# Altium PCB SV06.PcbDoc (part 2 of 3)
Units mil, origin at the board's own origin, x right, y up, seen from the top; angles counter-clockwise.
Board outline 3960.63 x 2763.78 mil, 2 copper layers (Top, Bottom), stack 12.7 mil thick; 211 components, 173 nets, 726 pads, 644 vias.
Unrouted connection lines stored in the file: 411.
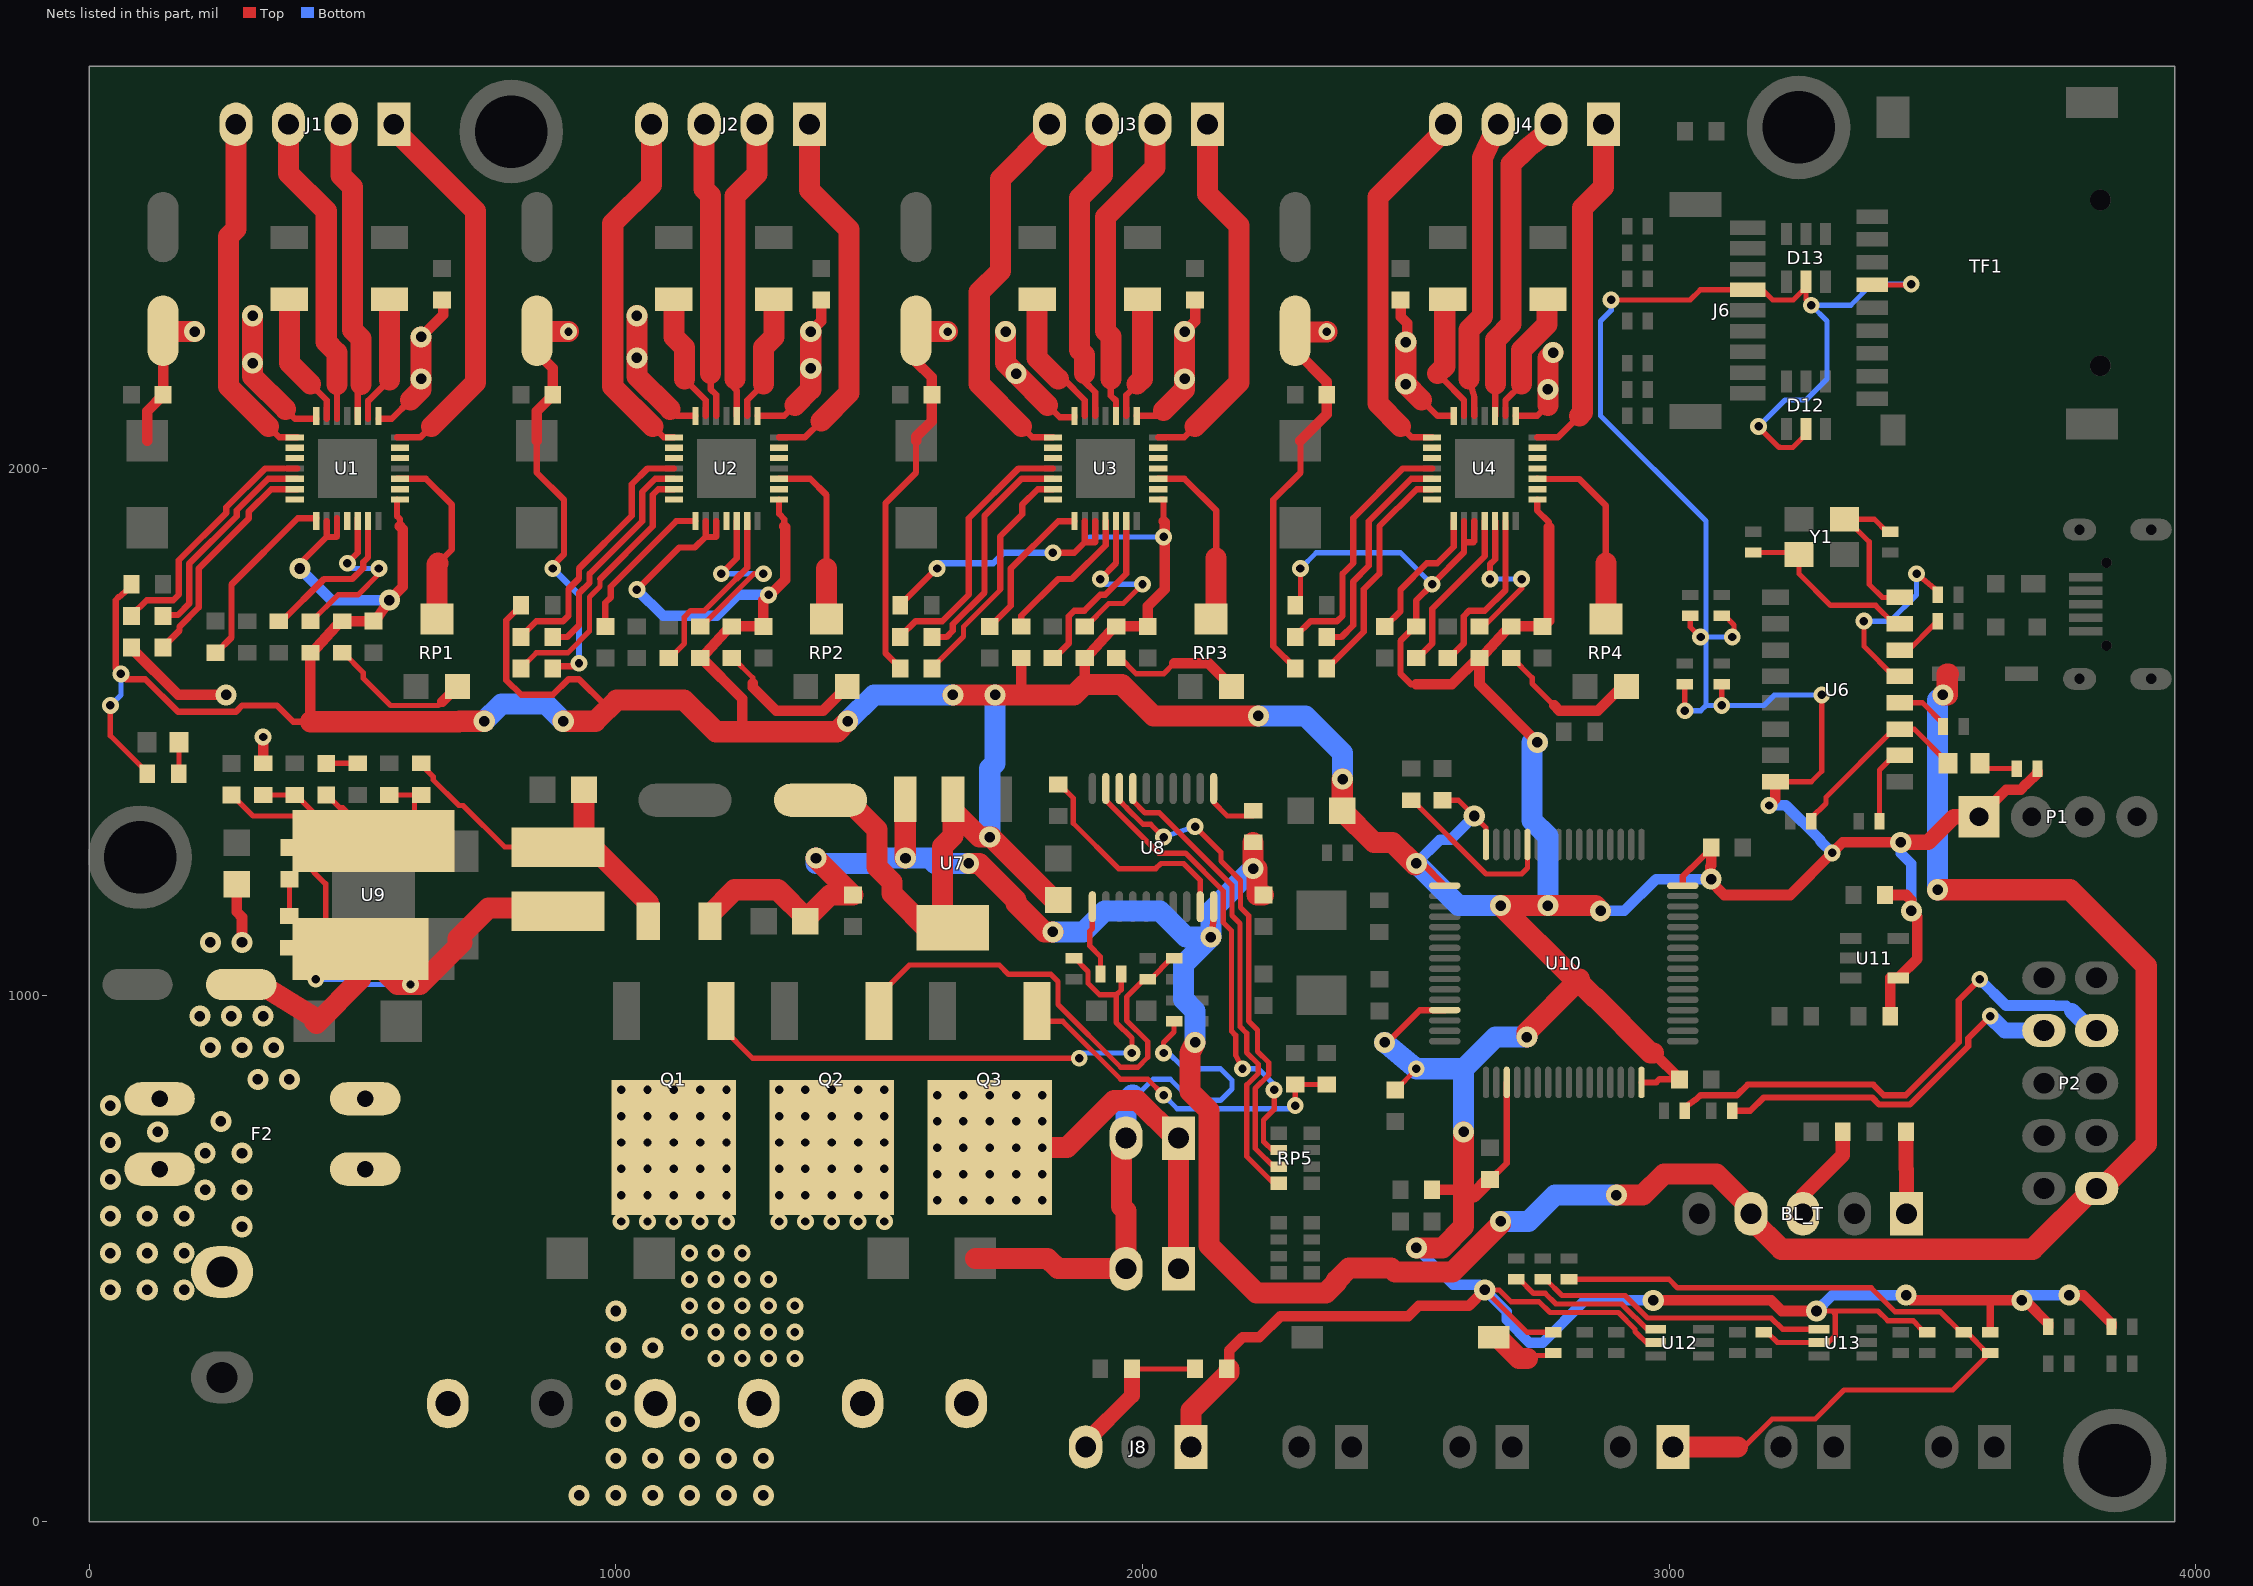
[diagram p2: the nets of this part, all layers, seen from the top]

## Via types
v1: diameter 32, hole 16, Top to Bottom, 363 vias
v2: diameter 40, hole 20, Top to Bottom, 281 vias

## Nets (pads, with @x,y where several pads share a name; then routed paths per layer and width w, separated by ;. In a path a pad name is that pad's centre, name@x,y a point inside that pad or via, vN(x,y) a via of type N, cw(c..) or ccw(c..) an arc to the next point about the centre after c; other vN are vias at no path point)
3V3: C22.1 C25.1 C28.1 C31.1 C36.2 C40.2 C41.2 C44.1 C51.2 C52.2 C53.2 C60.1 D12.5 D13.5 J6.4 J8.1 P1.1 R1.2 R2.2 R3.2 R4.2 R5.2 R6.2 R7.2 R8.2 R11.2 R12.2 R15.2 R16.2 R19.2 R20.2 R21.2 R23.2 R24.2 R25.2 R26.2 R37.1 R44.1 R49.2 R50.2 R52.2 R54.2 R56.2 R57.2 R59.2 R63.2 R66.2 TF1.4 U1.9 U1.10 U1.15 U2.9 U2.10 U2.15 U3.9 U3.10 U3.15 U4.9 U4.10 U4.15 U6.16 U7.2 U7.4 U10.1 U10.13 U10.19 U10.32 U10.48 U10.64 U11.4 U12.5 U13.5 | length 20809.5
  Top w10: v1(40,1550) 40,1492.5 110,1422.5 R26.2@110,1420 ; R8.2@2290,1740 2300,1740 v1(2300,1810) ; C52.2@2480,820 2481,820 2520,859 v1(2520,860) ; C36.2@2570,1370 2600,1370 v2(2630,1340) 2652.36,1317.64 U10.64@2652.36,1285.91 ; R63.2@2780,359.68 2730.32,359.68 v2(2650,440) 2677.54,440 2700,417.54 2753.18,417.54 2773.71,397.01 2903.81,397.01 2935.38,365.45 2935.38,361.42 2960.05,336.75 2974.72,336.75 U12.5@2974.72,340 ; v1(2890,2320) 3040,2320 3059.37,2339.37 J6.4@3158.07,2339.37 ; v1(3030,1540) R2.2@3030,1590.32 ; R1.2@3040,1720.32 3040,1699.48 3059.74,1679.74 v1(3060,1680) ; v1(3100,1550) R3.2@3100,1590.32 ; R4.2@3100,1720.32 3105.91,1720.32 3123.53,1702.7 3123.53,1683.53 v1(3120,1680) ; J6.4@3149.51,2339.37 J6.4@3158.07,2339.37 ; v1(3170,2080) 3170,2078.78 3208.78,2040 3209.77,2040 3210,2040.23 3210.23,2040 3234.97,2040 3260,2065.03 D12.5@3260,2074.76 ; R50.2@3180,359.68 3185.91,359.68 3205.59,340 U13.5@3284.72,340 3284.72,336.75 3299.39,336.75 3315.43,352.79 3315.43,394.57 3310,400 ; U6.16@3201.89,1405 3270,1405 3290,1425 v1(3290,1570) ; D13.5@3260,2354.76 D13.5@3260,2344.13 ; v1(3270,2310) 3260,2320 D13.5@3260,2344.13 ; v2(3280,400) 3310,400 ; TF1.4@3385.83,2348.43 3458.43,2348.43 v1(3460,2350) ; R52.2@3490,359.68 3483.63,359.68 3464.78,380.53 3463.63,381.68 3415.2,381.68 3396.87,400 3310,400 ; 3640,1390 3644.49,1394.49 3670.08,1394.49 3699.68,1424.09 R25.2@3699.68,1430 ; J6.4@3158.07,2339.37 3177.64,2339.37 3197.01,2320 3235.87,2320 D13.5@3260,2344.13
  Top w12: R5.2@80,1780 80,1776.07 55.26,1755.26 50,1750 50,1620 v1(60,1610) 70,1600 106.49,1600 168.49,1538 278.53,1538 290.53,1550 356.19,1550 387.19,1519 420,1519 ; v2(400,1810) 406.14,1825.51 450.63,1870 ; 450.63,1900.1 450.63,1870 ; 470.32,1905.51 470.32,1870.87 469.44,1870 450.63,1870 ; 584.49,1940.94 584.49,1909.28 590,1903.76 590,1890 ; R6.2@820,1740 792,1712 792,1598.03 820.03,1570 880,1570 910,1600 930,1600 980,1550 950,1520 ; v1(1040,1770) 1120,1850 1150,1850 1170.63,1870.63 ; 1170.63,1900.1 1170.63,1870.63 ; 1190.32,1900.1 1190.32,1870.87 1189.44,1870 1171.26,1870 1170.63,1870.63 ; 1309.9,1940.94 1309.9,1913.86 1320,1903.76 1320,1890 ; R7.2@1540,1740 1540,1741.46 1609.27,1810.73 v1(1610,1810) ; v1(1830,1840) 1870.63,1840 1890.63,1860 ; 1890.63,1900.1 1890.63,1860 ; 1910.32,1900.1 1910.32,1860.31 1910,1860 1890.63,1860 ; 2034.49,1940.94 2040,1940.94 2040,1900 ; v2(2460,910) 2462.63,907.37 2526.67,971.42 U10.13@2574.09,971.42 ; v2(2520,1250) 2531.73,1250 U10.1@2574.09,1207.64 ; 2520,1590 2510,1590 2490,1610 2490,1672.5 2517.5,1700 R21.2@2520,1700 2520,1749.37 2550.32,1779.68 v1(2550,1780) 2610.63,1840.63 2610.63,1860 ; 2610.63,1900.1 2610.63,1860 ; 2630.32,1900.1 2630.32,1861.68 2628.63,1860 2610.63,1860 ; C53.2@2660,650 2661,650 2691.73,680.73 U10.19@2691.73,834.09 ; 2749.9,1940.94 2749.9,1920 2772,1897.9 2772,1888 ; U10.32@2947.64,834.09 2975.87,834.09 2981.77,840 C51.2@3020,840 ; U10.48@3025.91,1207.64 3025.91,1225.64 3040.34,1240.08 3041.08,1240.08 3080,1279 C41.2@3080,1280
  Top w15: R54.2@3610,359.68 3610,420
  Top w20: 420,1519 R11.2@420,1650 423,1650 477,1710 R12.2@480,1710 C22.1@540,1710 542.94,1710 v2(570,1750) 595.46,1775.46 595.46,1884.54 590,1890 ; R15.2@1160,1640 R15.2@1162.5,1640 ; 1240,1500 1240,1562.5 R15.2@1162.5,1640 ; v1(1290,1760) 1280,1750 1280,1746.53 ; 1320,1890 1322,1888 1322,1788.53 1280,1746.53 ; 1770,1570 R66.2@1770,1640 ; 1890,1590 R19.2@1890,1640 1893,1640 1947,1700 R20.2@1950,1700 C28.1@2010,1700 2010,1738.37 2042,1770.37 2042,1898 2040,1900 ; R59.2@2160,290 2164.12,290 2165,290 2165,325 2190,350 2222.14,350 2262.14,390 2504.63,390 2524.63,410 2620,410 v2(2650,440) ; 2520,1590 2587.5,1590 2637.5,1640 R23.2@2640,1640 2643,1640 2697,1700 R24.2@2700,1700 C31.1@2760,1700 2761,1700 2772,1711 2772,1888 ; R49.2@2550,630 2610,630 2610,620 ; R23.2@2640,1630.37 2640,1590 v2(2750,1480) ; v2(2970,420) 3193.9,420 3213.9,400 v2(3280,400) ; 2970,890 2971,890 3020,841 C51.2@3020,840 ; C41.2@3080,1279 3080,1246.13 3078,1244.13 v2@3078,1218 ; v1(3190,1360) 3201.89,1371.89 U6.16@3201.89,1405 ; R37.1@3410,1190 3450,1190 3460,1180 v2(3460,1160) 3471.75,1148.25 3471.75,1069.17 U11.4@3435.18,1032.6 3420,1032.6 R44.1@3420,960 ; v2(3440,1290) 3330,1290 v1(3310,1270) 3230,1190 3104.75,1190 v2@3078,1216.75 ; v2(3450,430) 3448.97,430 3458.97,420 3610,420 v2(3670,420) 3676.23,420 3720.32,375.91 R56.2@3720.32,370 ; P1.1@3588.58,1338.58 3640,1390 3667.73,1390 3677.73,1400 3678.53,1400 3699.68,1421.15 R25.2@3699.68,1424.09 ; v2(3760,430) 3786.23,430 3840.32,375.91 R57.2@3840.32,370 ; R15.2@1162.5,1640 1163,1640 1217,1700 R16.2@1220,1700 C25.1@1280,1700 1280,1746.53 ; v2@3078,1216.75 v2(3080,1220) v2@3078,1218 ; v2@3078,1216.75 v2@3078,1218
  Top w28: 2610,620 2610.14,619.86 2628.86,619.86 2659,650 C53.2@2660,650
  Top w30: v2(3440,1290) 3492.2,1290 3540.78,1338.58 P1.1@3588.58,1338.58
  Top w40: 420,1519 702,1519 703,1520 v2(750,1520) ; v2(900,1520) 950,1520 961.69,1520 1001.69,1560 1129.75,1560 1189.75,1500 1240,1500 1420,1500 v2(1440,1520) ; C60.1@1388.63,1370 1439.81,1370 1495.74,1314.07 1495.74,1243.37 1524.5,1214.62 1524.5,1192.47 1601.69,1115.28 1640,1115.28 U7.4@1640,1128 1620,1128 1620,1281.69 1640,1301.69 U7.2@1640,1350.35 ; U7.2@1640,1372 U7.2@1640,1350.35 ; v2(1640,1570) v2(1720,1570) 1770,1570 1870,1570 1890,1590 1960.62,1590 2020.62,1530 v2(2220,1530) ; v2@1713.57,1300 v2@1712.76,1300 ; C44.1@1840,1180.63 1835.99,1180.63 1835.99,1176.61 1780,1232.6 1780,1232.76 v2@1712.76,1300 ; J8.1@2092.13,141.73 2092.13,211.4 2164.12,283.38 R59.2@2164.12,290 ; v2(2380,1410) 2379.37,1409.37 C40.2@2379.37,1350 2439.37,1290 2474.95,1290 2517.47,1247.47 v2(2520,1250) ; v2(2520,520) 2569.77,520 2610,560.23 2610,620 ; 2610,630 v2(2610,740) ; v2(2730,920) 2730,930 2830,1030 ; v2(2870,1160) 2860,1170 v2(2770,1170) v2(2680,1170) 2820,1030 2830,1030 ; 2970,890 2964.95,890 2860,994.95 2858.76,994.95 2830,1023.71 2830,1030 ; U7.2@1640,1350.35 1690.35,1300 v2(1710,1300) v2@1712.76,1300
  Bottom w10: v1(40,1550) 60,1570 v1(60,1610) ; v1(1830,1840) 1870,1840 1900,1870 v1(2040,1870) ; v1(2300,1810) 2330,1840 2490,1840 v1(2550,1780) ; v1(2890,2320) 2890,2300 2870,2280 2870,2100 3070,1900 v1@3070,1680 ; v1(3030,1540) 3060,1540 3070,1550 ; v1(3120,1680) v1@3070,1680 ; v1(3170,2080) 3220,2130 3260,2130 3300,2170 3300,2280 v1(3270,2310) 3345,2310 3385,2350 v1(3460,2350) ; v1(3290,1570) 3200,1570 3180,1550 v1(3100,1550) 3070,1550 ; 3070,1550 v1@3070,1670 ; v1@3070,1670 v1(3060,1680) v1@3070,1680 ; v1@3070,1670 v1@3070,1680
  Bottom w12: v1(1610,1810) 1610,1820 1716.63,1820 1736.63,1840 v1(1830,1840)
  Bottom w20: v2(400,1810) 460,1750 v2(570,1750) ; v1(1040,1770) 1090,1720 1191.63,1720 1231.63,1760 v1(1290,1760) ; v2(2520,520) 2590,450 2640,450 v2(2650,440) 2691.73,398.27 2691.73,383.02 2734.75,340 2760,340 2840,420 v2(2970,420) ; v2(2520,1250) 2565,1295 2585,1295 v2(2630,1340) ; v2(2870,1160) 2915.23,1160 2975.23,1220 v2(3080,1220) ; v1(3190,1360) 3222,1360 3287.37,1294.63 3287.37,1292.63 v1(3310,1270) ; v2(3280,400) 3310,430 v2(3450,430) ; v2(3440,1290) 3440,1269.63 3460,1249.63 v2(3460,1160) ; v2(3670,420) 3680,430 v2(3760,430)
  Bottom w40: v2(750,1520) 782.53,1552.53 867.47,1552.53 v2(900,1520) ; v2(1440,1520) 1490,1570 v2(1640,1570) ; v2(1710,1300) 1710,1430 1720,1440 v2(1720,1570) ; v2(2220,1530) 2310,1530 2380,1460 v2(2380,1410) ; v2(2460,910) v1(2520,860) 2610,860 ; v2(2520,1250) 2600,1170 v2(2680,1170) ; v2(2610,740) 2610,860 ; v2(2730,920) 2670,920 2610,860 ; v2(2750,1480) 2740,1480 2740,1331.58 2770,1301.58 v2(2770,1170)
5V: BL_T.4 C38.1 C39.2 C47.1 F1.2 P2.10 R36.1 U7.3 U8.20 | length 5705.8
  Top w12: v2(2130,1110) 2135.16,1145.16 U8.20@2135.16,1167.8
  Top w40: F1.2@1178.66,1140 1178.66,1153.19 1225.47,1200 1307.4,1200 C38.1@1362.2,1145.2 ; C38.1@1359.37,1140 C38.1@1359.37,1141.18 ; v2(1380,1260) 1379.61,1259.61 C39.2@1449.22,1190 ; C39.2@1450,1190 C39.2@1449.22,1190 ; U7.3@1549.45,1372 1549.45,1368 1549.45,1260 v2(1550,1260) ; v2(1670,1250) 1690,1250 1760,1180 1760,1173.86 1813.86,1120 v2(1830,1120) ; v2(2100,910) 2090,890 2090,816.45 2126,780.45 2126,524.6 2216.64,433.96 2348.01,433.96 2368,453.96 2368,457.4 2392.6,482 2472,482 2480,474 2588.82,474 2680,565.18 v2(2680,570) ; R36.1@2210,1290 v2(2210,1240) 2217.63,1240 2217.63,1190 C47.1@2230,1190 ; v2(2900,620) 2950,620 2990,660 3090,660 3155.51,594.49 BL_T.4@3155.51,584.65 3155.51,574.8 3213.01,517.31 3690.64,517.31 3806.01,632.68 P2.10@3811.81,632.68 3821.65,632.68 3906.15,717.17 3906.15,1054.95 3761.1,1200 v2(3510,1200) ; v2(3520,1570) 3528.24,1570 3528.24,1610 3530.5,1610 ; C38.1@1359.37,1141.18 1358.18,1141.18 C38.1@1359.37,1142.37 ; C38.1@1359.37,1141.18 C38.1@1359.37,1142.37 ; C38.1@1359.37,1142.37 1359.37,1144.01 C38.1@1361.01,1144.01 ; C38.1@1359.37,1142.37 C38.1@1361.01,1144.01 ; C38.1@1361.01,1144.01 1363.39,1144.01 C38.1@1362.2,1145.2 ; C38.1@1361.01,1144.01 C38.1@1362.2,1145.2 ; C38.1@1362.2,1145.2 1407,1190 C39.2@1449.22,1190
  Bottom w40: v2(1380,1260) 1380,1250 1494,1250 1504,1260 v2(1550,1260) 1596,1260 1606,1250 v2(1670,1250) ; v2(1830,1120) 1888.3,1120 1928.3,1160 2033,1160 2083,1110 v2(2130,1110) ; v2(2100,910) 2100,970 2078,992 2078,1058 v2(2130,1110) ; v2(2210,1240) 2130,1160 v2(2130,1110) ; v2(2680,570) 2733.3,570 2783.3,620 v2(2900,620) ; v2(3510,1200) 3510,1560 v2(3520,1570)
5VOUT: C46.1 F1.1 L1.2 R31.2 | length 704.2
  Top w10: R31.2@630,1440 630,1437.72 630.22,1437.72 653,1414.94 653,1408.82 701.82,1360 710,1360 788.98,1281.02 L1.2@890,1281.02
  Top w40: L1.2@890,1281.02 L1.2@934.55,1281.02 ; C46.1@939.37,1390 L1.2@939.37,1285.84 ; F1.1@1061.34,1140 1061.86,1140 1061.86,1174.51 944.95,1291.42 L1.2@939.37,1285.84 ; L1.2@934.55,1281.02 939.37,1281.02 L1.2@939.37,1285.84 ; L1.2@934.55,1281.02 L1.2@939.37,1285.84
24V: C1.2 C2.2 C3.1 C4.1 C5.1 C6.1 C7.1 C8.1 C9.1 C10.1 C11.2 C12.2 C20.1 C23.1 C26.1 C29.1 C42.1 C48.1 R27.2 U1.22 U1.28 U2.22 U2.28 U3.22 U3.28 U4.22 U4.28 U9.2 | length 5495.8
  Top w12: 372.49,2112.49 390.49,2094.49 430.94,2094.49 ; 549.06,2094.49 574.49,2094.49 610,2130 ; 850,2052.68 850,1992.17 901.37,1940.8 901.37,1836.83 877.27,1812.73 v1(880,1810) ; C23.1@880,1620 880,1624.55 930,1624.55 v1(930,1630) ; 1102.49,2112.49 1115.08,2099.9 1150.94,2099.9 ; 1269.06,2099.9 1319.9,2099.9 1340,2120 ; C26.1@1540,1620 1540,1621 1512,1649 1512,1934.17 1570,1992.17 1570,2052.68 ; 1820,2120 1842.63,2097.37 1870.94,2097.37 1870.94,2099.9 ; 1989.06,2099.9 2029.9,2099.9 2040,2110 ; C29.1@2290,1620 2290,1621 2248.63,1662.37 2248.63,1940.8 2300,1992.17 2300,2052.68 ; 2530,2130 2560.1,2099.9 2590.94,2099.9 ; 2709.06,2099.9 2749.9,2099.9 2770,2120
  Top w20: C20.1@80,1660 80,1659 169,1570 v2(260,1570) ; 110,2052.68 110,2109 140,2139 C9.1@140,2140 140,2260 C5.1@140,2261.57 ; C42.1@280,1210.63 280,1157.81 290,1147.81 v2(290,1100) ; R27.2@330,1440 v1(330,1490) ; v2(630,2250) 672,2292 672,2320 C1.2@670,2320 ; 850,2052.68 850,2109 880,2139 C10.1@880,2140 ; C6.1@850,2261.57 850,2220 880,2190 C10.1@880,2140 ; C10.1@882.64,2140 C10.1@880,2140 ; v2(1370,2260) 1390,2280 C2.2@1390,2320 ; 1570,2052.68 1570,2060 1600,2090 C11.2@1600,2140 1600,2173 1570,2203 1570,2260 C7.1@1570,2261.57 ; v2(2080,2260) 2100,2280 C3.1@2100,2320 ; C8.1@2290,2261.57 2290,2260 2290,2259.41 2290,2224.17 2350,2164.17 C12.2@2350,2140 2350,2102.68 2300,2052.68 ; C4.1@2490,2320 2490.73,2320 2490.73,2288 2502.73,2276 2502.73,2240 v2(2500,2240)
  Top w40: C5.1@140,2260 v2(200,2260) ; C48.1@288.43,1020 325.83,1020 427.32,957.43 427.32,950 431.09,950 431.09,946.23 515,1030.14 U9.2@515,1087.64 ; v2(310,2290) v2(310,2200) 310,2174.98 372.49,2112.49 ; 610,2130 630,2150 v2(630,2170) v2(630,2250) ; C6.1@850,2261.57 852.72,2260 v1(910,2260) ; v2(1040,2290) v2(1040,2210) 1040,2174.98 1102.49,2112.49 ; 1340,2120 1370,2150 v2(1370,2190) v2(1370,2260) ; C7.1@1570,2260 v1(1630,2260) ; v2(1740,2260) 1740,2200 v2(1760,2180) 1820,2120 ; 2040,2110 2080,2150 v2(2080,2170) v2(2080,2260) ; C8.1@2290,2259.41 2350,2259.41 v1(2350,2260) ; v2(2500,2240) v2(2500,2160) 2530,2130 ; 2770,2120 v2(2770,2150) 2770,2210 v2(2780,2220)
  Bottom w12: v1(880,1810) 930,1760 v1(930,1630)
  other v2: 320,840 380,840 230,900 290,900 350,900 210,960 270,960 330,960 230,1100
24V_IN: BED.1 F2.3 F2.4 FAN.1 HEAT1.1 J5.2 J7.2 R67.2 | length 1109.1
  Top w10: v1(2040,890) 2040,910 2060,930 R67.2@2060,950.32
  Top w40: 1682.68,500 1819.69,500 1839.37,480.31 J7.2@1968.5,480.31 1968.5,589.88 1960,598.38 1960,728.35 J5.2@1968.5,728.35
  Bottom w10: 1981.82,810 1990,810 2020,840 2052.78,840 2092.78,800 2148.18,800 2170,821.82 2170,838.18 2148.18,860 2080,860 2045,895 v1(2040,890)
  Bottom w40: J5.2@1968.5,728.35 1968.5,798.5 1980,810 1981.82,810
  other v2: 930,50 1000,50 1070,50 1140,50 1210,50 1280,50 1000,120 1070,120 1140,120 1210,120 1280,120 1000,190 1140,190 1000,260 1000,330 1070,330 1000,400
$$$280: D6.2 R26.1 | length 60.3
  Top w10: R26.1@170,1420 170.32,1420 D6.2@170.32,1480
$$$2564: R15.1 U2.12 | length 358
  Top w10: R15.1@1160,1700 1162.5,1700 1262.5,1800 v1(1280,1800)
  Top w12: v1(1200,1800) 1229.68,1829.68 1229.68,1900.1
  Bottom w10: v1(1200,1800) 1205,1805 1210,1800 v1(1280,1800)
$$$2565: R14.1 U2.13 | length 338.8
  Top w10: R14.1@1100,1640 1102.5,1640 1130,1667.5 1130,1718.06 1141.94,1730 1168.18,1730 1228.18,1790
  Top w12: 1228.18,1790 1249.37,1811.19 1249.37,1900.1
$$$2566: R16.1 RP2.3 | length 290.3
  Top w10: R16.1@1220,1640 1222.5,1640 1260,1602.5 1260,1591.82
  Top w20: 1260,1591.82 1260,1584.75 1304.75,1540 1393.34,1540 RP2.3@1439.37,1586.03
$$$2567: RP2.2 U2.17 | length 338.4
  Top w12: 1309.9,1980.31 1369.28,1980.31 1400,1949.6 1400,1810
  Top w40: RP2.2@1400,1713.98 1400,1810
$$$2568: C17.1 U2.4 | length 499.1
  Top w12: C17.1@820,1680 820,1681 849,1710 899.47,1710 910,1720.53 910,1771.12 930,1791.12 930,1810 1030,1910 1030,1970 1060,2000 1110.1,2000
$$$2569: C17.2 U2.5 | length 432.7
  Top w12: C17.2@880,1680 908,1680 930,1702 930,1762.8 950,1782.8 950,1800 1050,1900 1050,1955.46 1074.86,1980.31 1110.1,1980.31
$$$2570: C23.2 U2.6 | length 513.2
  Top w10: C23.2@820,1620 820,1621 849,1650 909,1650 950,1691 950,1755.9 970,1775.9 970,1790
  Top w12: 970,1790 1070,1890 1070,1950 1080.63,1960.63 1110.1,1960.63
$$$2571: S4.2 U2.23 | length 242.4
  Top w12: 1249.37,2099.9 1249.37,2129.37 1280,2160
  Top w40: 1280,2160 1280,2229.55 1300,2249.55 S4.2@1300,2321.34
$$$2572: S3.2 U2.27 | length 246.6
  Top w12: 1130,2170 1170.63,2129.37 1170.63,2099.9
  Top w40: S3.2@1110,2321.34 1110,2250 1130,2230 1130,2170
$$$2573: C24.1 U2.8 | length 296.8
  Top w10: C24.1@980,1700 C24.1@984.62,1700
  Top w12: C24.1@980,1700 980,1744.93 990,1754.93 990,1775.46 1114.64,1900.1 1150.94,1900.1
$$$2574: J2.1 U2.21 | length 709.6
  Top w12: 1309.9,2059.06 1359.06,2059.06 1390,2090
  Top w40: J2.1@1367.72,2653.54 1367.72,2529.13 1443,2453.85 1443,2143 1390,2090
$$$2575: J2.2 U2.24 | length 572.4
  Top w12: 1226,2170 1226,2151.41 1229.68,2147.72 1229.68,2099.9
  Top w40: 1226,2170 1226,2517.77 1267.72,2559.49 J2.2@1267.72,2653.54
$$$2576: J2.3 U2.26 | length 563
  Top w12: 1180,2180 1180,2150 1190.32,2139.68 1190.32,2099.9
  Top w40: J2.3@1167.72,2653.54 1167.72,2530.8 1180,2518.51 1180,2180
$$$2577: J2.4 U2.1 | length 684.4
  Top w12: 1070,2079.93 1090.87,2059.06 1110.1,2059.06
  Top w40: J2.4@1067.72,2653.54 1067.72,2538.51 994,2464.8 994,2155.93 1070,2079.93
$$$5473: HEAT1.2 Q2.2
  other v1: 1310,570 1360,570 1410,570 1460,570 1510,570 1310,620 1360,620 1410,620 1460,620 1510,620 1310,670 1360,670 1410,670 1460,670 1510,670 1310,720 1360,720 1410,720 1460,720 1510,720 1310,770 1360,770 1410,770 1460,770 1510,770 1310,820 1360,820 1410,820 1460,820 1510,820
$$$5502: J5.1 J7.1 Q3.2 | length 674.4
  Top w40: Q3.2@1710,710.4 1856.75,710.4 1946.36,800 1990.55,800 2060.43,730.12 2060.43,728.35 J5.1@2068.5,728.35 J7.1@2068.5,480.31
  other v1: 1610,610 1660,610 1710,610 1760,610 1810,610 1610,660 1660,660 1710,660 1760,660 1810,660 1610,710 1660,710 1710,710 1760,710 1810,710 1610,760 1660,760 1710,760 1760,760 1810,760 1610,810 1660,810 1710,810 1760,810 1810,810
$$$5770: R19.1 U3.12 | length 355.6
  Top w10: R19.1@1890,1700 1892.5,1700 1935.95,1743.45 1963.45,1743.45 v1@1999.06,1779.06 ; v1@1999.06,1779.06 v1(2000,1780) 1999.06,1776.56 v1@1999.06,1779.06
  Top w12: v1(1920,1790) 1949.68,1820.31 1949.68,1900.1
  Bottom w10: v1(1920,1790) 1930,1780 v1(2000,1780)
$$$5771: R18.1 U3.13 | length 336.3
  Top w12: R18.1@1830,1640 1832.5,1640 1860,1667.5 1860,1719.47 1870.53,1730 1889.79,1730 1919.79,1760 1929.6,1760 1969.37,1799.77 1969.37,1900.1
$$$5772: R20.1 RP3.3 | length 262.2
  Top w10: R20.1@1950,1640 1950,1642.78 1955.28,1642.78 1988.06,1610 2040.18,1610 2060.18,1630
  Top w20: 2060.18,1630 2125.39,1630 RP3.3@2169.37,1586.03
$$$5773: RP3.2 U3.17 | length 350.9
  Top w12: 2029.9,1980.31 2079.68,1980.31 2139.85,1920.15 2139.85,1829.85
  Top w40: RP3.2@2130,1713.98 2139.85,1713.98 2139.85,1829.85
$$$5774: C18.1 U3.4 | length 508.1
  Top w12: C18.1@1540,1680 1540,1681 1569,1710 1619.47,1710 1670,1760.53 1670,1905.46 1764.54,2000 1830.1,2000
$$$5775: C18.2 U3.5 | length 447
  Top w12: C18.2@1600,1680 1628,1680 1640,1692 1640,1704.3 1700,1764.3 1700,1910 1770.32,1980.31 1830.1,1980.31
$$$5776: C26.2 U3.6 | length 453.1
  Top w10: C26.2@1600,1620 1600,1621 1660,1681 1660,1699.48 1730,1769.48 1730,1771.1
  Top w12: 1730,1771.1 1730,1870.95 1771.8,1912.75 1771.8,1931.56 1800.87,1960.63 1830.1,1960.63
$$$5777: S6.2 U3.23 | length 234.1
  Top w12: 1969.37,2099.9 1969.37,2139.37 1990,2160
  Top w40: 1990,2160 2000,2170 S6.2@2000,2321.34
$$$5778: S5.2 U3.27 | length 264.8
  Top w12: 1840,2170 1850,2170 1890.63,2129.37 1890.63,2099.9
  Top w40: S5.2@1800,2321.34 1800,2210 1840,2170
$$$5779: C27.1 U3.8 | length 285.5
  Top w12: C27.1@1710,1700 1711,1700 1750,1739 1750,1810 1840,1900 1870.94,1900 1870.94,1900.1
$$$5780: J3.1 U3.21 | length 711.3
  Top w12: 2029.9,2059.06 2079.06,2059.06 2100,2080
  Top w40: 2100,2080 2183,2163 2183,2461.8 2123.62,2521.18 J3.1@2123.62,2653.54
$$$5781: J3.2 U3.24 | length 601.1
  Top w12: 1940,2170 1940,2138 1948,2130 1948.81,2130 1949.68,2129.13 1949.68,2099.9
  Top w40: 1940,2170 1940,2250.97 1930,2260.97 1930,2477.85 2023.62,2571.47 J3.2@2023.62,2653.54
$$$5782: J3.3 U3.26 | length 584.3
  Top w12: 1890,2180 1890,2165.1 1910.32,2144.79 1910.32,2099.9
  Top w40: 1890,2180 1890,2215.49 1880,2225.49 1880,2513.92 1923.62,2557.54 J3.3@1923.62,2653.54
$$$5783: J3.4 U3.1 | length 730.8
  Top w12: 1770,2080 1790.94,2059.06 1830.1,2059.06
  Top w40: 1770,2080 1690,2160 1690,2335 1730,2375 1730,2550.08 1823.62,2643.7 J3.4@1823.62,2653.54
$$$7411: R23.1 U4.12 | length 305.9
  Top w10: R23.1@2640,1700 2640,1697.22 2645.28,1697.22 2720,1771.94 v1(2720,1790)
  Top w12: v1(2660,1790) 2660,1818.08 2669.68,1827.76 2669.68,1900.1
  Bottom w10: v1(2660,1790) v1(2720,1790)
$$$7412: R22.1 U4.13 | length 324.4
  Top w12: R22.1@2580,1640 2582.5,1640 2610,1667.5 2610,1719.47 2620.03,1729.5 2650,1729.5 2689.37,1768.87 2689.37,1900.1
$$$7413: R24.1 RP4.3 | length 292.4
  Top w10: R24.1@2700,1640 2702.5,1640 2740,1602.5 2740,1591.82 2781.82,1550
  Top w20: 2781.82,1550 2791.82,1540 2864.48,1540 2914.94,1590.46 2919.37,1590.46 RP4.3@2919.37,1586.03
$$$7414: RP4.2 U4.17 | length 367
  Top w12: 2749.9,1980.31 2749.9,1980.1 ; 2880,1820 2880,1929.6 2829.6,1980 2750,1980 ; 2749.9,1980.1 2750,1980 ; 2749.9,1980.1 2749.9,1980 2750,1980
  Top w40: RP4.2@2880,1713.98 2880,1820
$$$7415: C19.1 U4.4 | length 490
  Top w12: C19.1@2290,1680 2290,1681 2319,1710 2369.47,1710 2380,1720.53 2380,1800.34 2400,1820.34 2400,1905.77 2494.23,2000 2550.1,2000
$$$7416: C19.2 U4.5 | length 422.9
  Top w12: C19.2@2350,1680 2378,1680 2400,1702 2400,1785.34 2430,1815.34 2430,1900 2510.32,1980.31 2550.1,1980.31
$$$7417: C29.2 U4.6 | length 440.8
  Top w12: C29.2@2350,1620 2420,1690 2420,1770.34 2450,1800.34 2450,1890 2520.63,1960.63 2550.1,1960.63
$$$7418: S8.2 U4.23 | length 256
  Top w12: 2689.37,2099.9 2689.37,2129.37 2720,2160
  Top w40: 2720,2160 2720,2225.05 2768.04,2273.09 2768.04,2321.34 S8.2@2770,2321.34
$$$7419: S7.2 U4.27 | length 255.4
  Top w12: 2560,2180 2560,2178 2568,2170 2570,2170 2610.63,2129.37 2610.63,2099.9
  Top w40: 2560,2180 2574,2194 2574,2321.34 S7.2@2580,2321.34
$$$7420: C30.1 U4.8 | length 266.4
  Top w12: C30.1@2460,1700 2461,1700 2490,1729 2490,1770 2540,1820 2559.6,1820 2590.94,1851.35 2590.94,1900.1
$$$7421: J4.1 U4.21 | length 669.5
  Top w12: 2749.9,2059.06 2789.06,2059.06 2830,2100
  Top w40: 2830,2100 2836,2106 2836,2494.57 2875.59,2534.16 J4.1@2875.59,2653.54
$$$7422: J4.2 U4.24 | length 601
  Top w12: 2669.68,2099.9 2670,2099.9 2670,2160
  Top w40: 2670,2160 2670,2244.24 2700,2274.24 2700,2577.95 2730.01,2607.97 2775.59,2643.7 J4.2@2775.59,2653.54
$$$7423: J4.3 U4.26 | length 575.7
  Top w12: 2620,2170 2630.32,2135.06 2630.32,2099.9
  Top w40: 2620,2170 2620,2263.43 2645.6,2289.03 2645.6,2590 2671.19,2645.72 2671.19,2653.54 J4.3@2675.59,2653.54
$$$7424: J4.4 U4.1 | length 713.4
  Top w12: 2490,2080 2510.94,2059.06 2550.1,2059.06
  Top w40: 2490,2080 2447,2123 2447,2515.11 2575.59,2643.7 J4.4@2575.59,2653.54
$$$7564: J8.3 R58.2 R59.1 | length 304.7
  Top w10: R58.2@1980,290 R59.1@2100,290
  Top w30: J8.3@1892.13,141.73 1892.13,151.57 1980,239.45 R58.2@1980,290
$$$8275: R63.1 S9.2 | length 136.5
  Top w10: 2731.07,310 2736.53,315.47 2780,315.47 R63.1@2780,320.31
  Top w40: S9.2@2667.16,350 2675.03,350 2715.07,309.96 2729.96,309.96 2730,310 2731.07,310
$$$11500: BL_T.1 R48.2 | length 155.7
  Top w28: R48.2@3450,740 3450,670 3450.79,669.21 BL_T.1@3450.79,584.65
$$$11539: BL_T.3 R47.2 | length 186.9
  Top w28: BL_T.3@3253.94,584.65 3253.94,620 3330,696.06 R47.2@3330,740
$$$12002: C43.1 U9.1 | length 228.1
  Top w10: C43.1@380,1280 381.83,1280 404.28,1255.72 448.87,1211.13 448.87,1123.45 465,1107.32 U9.1@465,1087.64
$$$12005: C43.2 R38.1 | length 70
  Top w10: R38.1@380,1150 C43.2@380,1220
$$$12017: J1.1 U1.21 | length 746.2
  Top w12: 584.49,2059.06 629.06,2059.06 650,2080
  Top w40: J1.1@578.35,2653.54 578.35,2643.7 733,2489.05 733,2163 650,2080
$$$12018: L1.1 R38.2 U9.3 | length 733.5
  Top w10: R38.2@380,1090 382.5,1090 410.91,1061.59 410.91,1049.09 v1(430,1030)
  Top w40: U9.3@565,1087.64 565,1040 585,1020 v1(610,1020) 628.19,1020 707.75,1099.57 700,1099.57 700,1107.32 757.75,1165.08 890,1165.08 L1.1@890,1158.98
  Bottom w10: v1(430,1030) 515,1030 525,1020 v1(610,1020)
$$$12023: J1.2 U1.24 | length 577.5
  Top w12: 509.68,2094.49 509.68,2153.06 516.32,2159.68
  Top w40: J1.2@478.35,2653.54 478.35,2556.37 500,2534.72 500,2262.97 516.32,2246.66 516.32,2159.68
$$$12028: J1.3 U1.26 | length 597.1
  Top w12: 470.32,2094.49 470.32,2159.68
  Top w40: J1.3@378.35,2653.54 378.35,2560.48 450,2488.83 450,2240 470.32,2219.68 470.32,2159.68
$$$12035: J1.4 U1.1 | length 675.2
  Top w12: 340,2079.93 360.87,2059.06 395.51,2059.06
  Top w40: J1.4@278.35,2653.54 278.35,2454.8 264,2440.46 264,2155.93 340,2079.93
$$$12073: R30.2 R31.1 U9.5 | length 150.1
  Top w10: R30.2@570,1380 R31.1@617.5,1380 ; U9.5@615,1292.36 617.5,1292.36 R31.1@617.5,1380 ; R31.1@630,1380 R31.1@617.5,1380
$$$12171: R27.1 R28.2 U9.7 | length 231.6
  Top w10: R27.1@330,1380 R28.2@390,1380 392.5,1380 432.5,1340 470,1340 500,1310 515,1310 U9.7@515,1292.36
$$$12210: C32.1 U9.8 | length 242.5
  Top w10: C32.1@270,1380 271,1380 311,1340 406.25,1340 434.81,1311.44 465,1311.44 U9.8@465,1292.36
$$$12278: C33.1 U9.6 | length 162.8
  Top w10: C33.1@450,1380 451,1380 474.89,1356.11 481.17,1356.11 497.29,1340 537.05,1340 565,1312.05 U9.6@565,1292.36
$$$12281: C33.2 R29.2 | length 60
  Top w10: C33.2@450,1440 R29.2@510,1440
$$$15799: R33.1 U10.60 | length 328.5
  Top w10: R33.1@2510,1370 2512.5,1370 2652.5,1230 2720,1230 2731.1,1241.1 U10.60@2731.1,1285.91
$$$17590: R66.1 U3.11 | length 281.5
  Top w12: R66.1@1770,1700 1770,1720 1840,1790 1865.77,1790 1930,1854.23 1930,1900.1
$$$18645: R11.1 U1.12 | length 335.7
  Top w10: R11.1@420,1710 422.5,1710 472.5,1760 510,1760 549.06,1799.06 549.06,1810 v1(550,1810)
  Top w12: v1(490,1820) 489.89,1820.11 509.68,1839.91 509.68,1905.51
  Bottom w10: v1(490,1820) 500,1810 v1(550,1810)
$$$18657: R10.1 U1.13 | length 300.6
  Top w12: R10.1@360,1710 365.62,1710 445.62,1790 499.6,1790 520.06,1810.46 520.06,1822.22 529.37,1831.54 529.37,1905.51
$$$19214: Q2.1 R42.1 R43.2 | length 929.5
  Top w10: Q2.1@1499.48,969.6 1499.48,999.13 1557.35,1057 1728,1057 1745.64,1039.36 1825.99,1039.36 1839.66,1025.69 1839.66,982.15 1958.82,863 1991.18,863 2010,881.82 2010,911.56 1970,951.56 1970,996.23 2004.09,1030.32 R43.2@2010,1030.32 2016.1,1030.32 2053.9,1069.69 R42.1@2060,1069.69
$$$19611: RP5.8 U8.7 | length 908.6
  Top w10: U8.7@1981.61,1392.2 1981.61,1369.57 2005.13,1346.05 2032.13,1346.05 2169.84,1208.35 2169.84,1151.25 2185.26,1135.82 2185.26,940.05 2197.81,927.5 2197.81,890.7 2220,868.51 2220,851.49 2198,829.49 2198,693.61 2252.2,639.41 2258.5,639.41 RP5.8@2258.5,642.76
$$$19787: Q3.1 R45.2 R46.1 | length 689
  Top w10: Q3.1@1799.48,969.6 1799.48,950 1848.69,950 1958.69,840 2010,840 v1(2040,810) ; v1(2290,790) 2285,795 2290,800 R45.2@2290,830 R46.1@2350,830
  Bottom w10: v1(2040,810) 2066,784 2290,784 v1(2290,790)
$$$20193: RP5.7 U8.8 | length 939.9
  Top w10: U8.8@1956.02,1392.2 1956.02,1369.57 1970,1355.59 1970,1355.54 2001.11,1324.43 2015.57,1324.43 v1(2040,1300) ; v1(2100,1320) 2149.05,1270.95 2149.05,1254.44 2186.23,1217.25 2186.23,1166.54 2201.59,1151.18 2201.59,950.85 2218.62,933.82 2218.62,892.85 2240,871.47 2240,848.53 2214,822.53 2214,709.11 2250.73,672.38 2258.5,672.38 RP5.7@2258.5,674.25
  Bottom w10: v1(2040,1300) v1(2100,1320)
$$$20195: RP5.6 U8.9 | length 896.3
  Top w10: U8.9@1930.43,1392.2 1930.43,1369.57 2030.5,1269.5 2081.39,1269.5 2153.44,1197.45 2153.44,1137.71 2169.01,1122.14 2169.01,931.43 2177,923.43 2177,885.18 v1(2190,860) ; v1(2250,820) 2250,782.92 2230,762.92 2230,721.61 2249.23,702.38 2258.5,702.38 RP5.6@2258.5,705.75
  Bottom w10: v1(2190,860) 2220,860 2250,830 v1(2250,820)
$$$20338: R36.2 U8.1 | length 122.5
  Top w10: U8.1@2135.16,1392.2 2134.73,1392.2 2134.73,1366.32 2161.06,1340 2210,1340 R36.2@2210,1350
$$$20351: R32.1 U8.19 | length 431.8
  Top w10: R32.1@1840,1400 1842.5,1400 1868.5,1374 1868.5,1326.28 1954.78,1240 2025,1240 2035,1250 2078.18,1250 2109.57,1218.62 U8.19@2109.57,1167.8
$$$20356: R21.1 U4.11 | length 315.4
  Top w12: R21.1@2520,1640 2522.5,1640 2550,1667.5 2550,1733.61 2650,1833.61 2650,1900.1
$$$23378: R13.1 U12.4 | length 307.7
  Top w10: R13.1@2710,460.31 2715.91,460.31 2742.68,433.54 2764.93,433.54 2784.96,413.51 2910.03,413.51 2960.62,362.91 2974.72,362.91 U12.4@2974.72,365.59
$$$24620: D5.2 R25.1 | length 80
  Top w10: D5.2@3590.32,1440 3590.32,1430 R25.1@3660.31,1430
$$$24621: D5.1 R34.1 U6.3 | length 370.2
  Top w10: R34.1@3269.69,1330 3269.69,1335.91 3297.84,1364.06 3297.84,1375.56 3427.28,1505 U6.3@3438.11,1505 3465.67,1505 3529.69,1440.98 D5.1@3529.69,1440
$$$24623: C14.1 U6.7 Y1.1 | length 357.8
  Top w10: C14.1@3160,1840.31 3246.69,1840.31 Y1.1@3246.69,1836.53 3246.69,1800 3306.69,1740 3392.28,1740 3427.28,1705 U6.7@3438.11,1705
$$$24624: C13.2 U6.8 Y1.3 | length 306.2
  Top w10: Y1.3@3333.31,1903.47 Y1.3@3337.25,1903.47 ; C13.2@3420,1879.68 3414.1,1879.68 3390.32,1903.47 Y1.3@3337.25,1903.47 ; U6.8@3438.11,1755 3405,1755 3380,1780 3380,1860.71 Y1.3@3337.25,1903.47
$$$24628: C15.1 U6.4 | length 104.3
  Top w10: U6.4@3438.11,1555 3481.22,1555 3520.31,1515.9 C15.1@3520.31,1510
$$$24629: R35.1 U6.2 | length 147.3
  Top w10: R35.1@3399.69,1330 3399.69,1427.41 3427.28,1455 U6.2@3438.11,1455
$$$24673: C57.2 J11.1 R54.1 R64.2 | length 1537.5
  Top w10: R64.2@2810,460.32 3000,460.32 3016.36,443.96 3383.87,443.96 3429.49,398.34 3515.44,398.34 3554.1,359.68 C57.2@3560,359.68 ; 3130,141.73 3142.66,141.73 3195.98,195.05 3277.53,195.05 3332.48,250 3538.75,250 R54.1@3609.06,320.31 ; C57.2@3560,363.21 C57.2@3560,359.68 ; R54.1@3610,320.31 R54.1@3609.06,320.31 ; C57.2@3560,359.68 3566.1,359.68 3603.9,320.31 R54.1@3609.06,320.31
  Top w40: J11.1@3007.48,141.73 3130,141.73
$$$24916: F2.1 F2.2 P3.2
  other v2: 40,440 110,440 180,440 40,510 110,510 180,510 290,560 40,580 110,580 180,580 220,630 290,630 40,650 220,700 290,700 40,720 130,740 250,760 40,790
$$$24933: R51.1 U13.4 | length 564
  Top w10: R51.1@2760,460.31 2765.91,460.31 2796.71,429.51 2916.65,429.51 2959.23,386.93 3193.9,386.93 3215.24,365.59 U13.4@3284.72,365.59
$$$26347: R12.1 RP1.3 | length 282
  Top w10: R12.1@480,1650 482.5,1650 520,1612.5 520,1601.82 571.82,1550 663.34,1550 670,1556.66
  Top w20: 670,1556.66 RP1.3@699.37,1586.03
$$$26355: RP1.2 U1.17 | length 352.9
  Top w12: 584.49,1980.31 639.28,1980.31 688,1931.6 688,1845.96 662.04,1820
  Top w40: RP1.2@660,1713.98 660,1817.95 662.04,1820
$$$26401: C16.1 U1.4 | length 476.4
  Top w12: C16.1@80,1720 80,1721 109,1750 159.47,1750 170,1760.53 170,1825.41 260,1915.41 260,1926.17 333.83,2000 395.51,2000
$$$26406: C16.2 U1.5 | length 415.3
  Top w12: C16.2@140,1720 140,1721.57 168,1721.57 190,1743.57 190,1819.46 280,1909.46 280,1920.71 339.6,1980.31 395.51,1980.31
$$$26553: C20.2 U1.6 | length 435.8
  Top w12: C20.2@140,1660 140,1661 171.24,1692.24 171.24,1699.36 208,1736.11 208,1810 303,1905 303,1918.25 345.38,1960.63 395.51,1960.63
$$$26660: S2.2 U1.23 | length 244.6
  Top w12: 529.37,2094.49 529.37,2129.13 531.01,2129.13 570,2168.12
  Top w40: 570,2168.12 S2.2@570,2321.34
$$$26663: S1.2 U1.27 | length 256.1
  Top w12: 420,2160 450.63,2129.37 450.63,2094.49
  Top w40: S1.2@380,2321.34 380,2200 420,2160
$$$26686: C21.1 U1.8 | length 355.7
  Top w12: C21.1@240,1650 241,1650 270,1679 270,1779.6 395.91,1905.51 430.94,1905.51
$$$32108: P2.3 R17.2 | length 698
  Top w12: R17.2@3119.68,780 3154.09,780 3179.59,805.5 3385.67,805.5 3399.17,792 3457.05,792 3568,902.95 3568,918 v1(3610,960)
  Bottom w30: v1(3610,960) 3637.32,932.68 P2.3@3711.81,932.68
$$$32145: P2.4 R65.1 | length 991.8
  Top w12: R65.1@3029.69,780 3029.69,787.09 3052.72,803.03 3059.69,810 3129.1,810 3149.1,830 3387.61,830 3407.61,810 3449.6,810 3550,910.4 3550,990 v1(3590,1030)
  Bottom w20: v1(3590,1030) 3639.83,980.17 3730,980.17 3730,980 3754.65,980 3764.65,970
  Bottom w30: 3764.65,970 3801.97,932.68 P2.4@3811.81,932.68
$$$32443: BED.2 Q1.2
  other v1: 1190,310 1240,310 1290,310 1340,310 1140,360 1190,360 1240,360 1290,360 1340,360 1140,410 1190,410 1240,410 1290,410 1340,410 1140,460 1190,460 1240,460 1290,460 1140,510 1190,510 1240,510 1010,570 1060,570 1110,570 1160,570 1210,570 1010,620 1060,620 1110,620 1160,620 1210,620 1010,670 1060,670 1110,670 1160,670 1210,670 1010,720 1060,720 1110,720 1160,720 1210,720 1010,770 1060,770 1110,770 1160,770 1210,770 1010,820 1060,820 1110,820 1160,820 1210,820
$$$32478: Q1.1 R40.1 R41.2 | length 1163.3
  Top w10: Q1.1@1199.48,999.48 Q1.1@1199.48,969.6 1199.48,940.07 1259.55,880 v1(1880,880) ; R40.1@1870,1069.69 1870.31,1070 1871.47,1070 1896.75,1044.72 1896.75,1022.42 1918.48,1000.68 1949.63,1000.68 1950,1000.32 ; R41.2@1959.68,1040 1959.68,1010 1950,1000.32 ; v1(1980,890) 1980,918.18 1950,948.18 1950,1000.32
  Bottom w10: v1(1880,880) 1880,890 v1(1980,890)
BED_5V: R41.1 U8.11 | length 138.2
  Top w10: U8.11@1904.84,1167.8 1904.84,1126.41 1900,1121.57 1900,1093.12 1920.31,1072.81 R41.1@1920.31,1040
D+: R71.2 U6.5 | length 359.3
  Top w10: v1(3370,1710) 3370,1662.28 3427.28,1605 U6.5@3438.11,1605 ; v1(3470,1800) 3510.32,1766.76 R71.2@3510.32,1760
  Bottom w10: v1(3370,1710) 3420,1710 3470,1760 v1(3470,1800)
D-: R72.2 U6.6 | length 101
  Top w10: U6.6@3438.11,1655 3438.11,1651.93 3452.01,1651.93 3507.25,1707.17 3507.25,1710 R72.2@3510.32,1710